# EAGLE board Sensor Carousel (EAGLE 9.2.2)
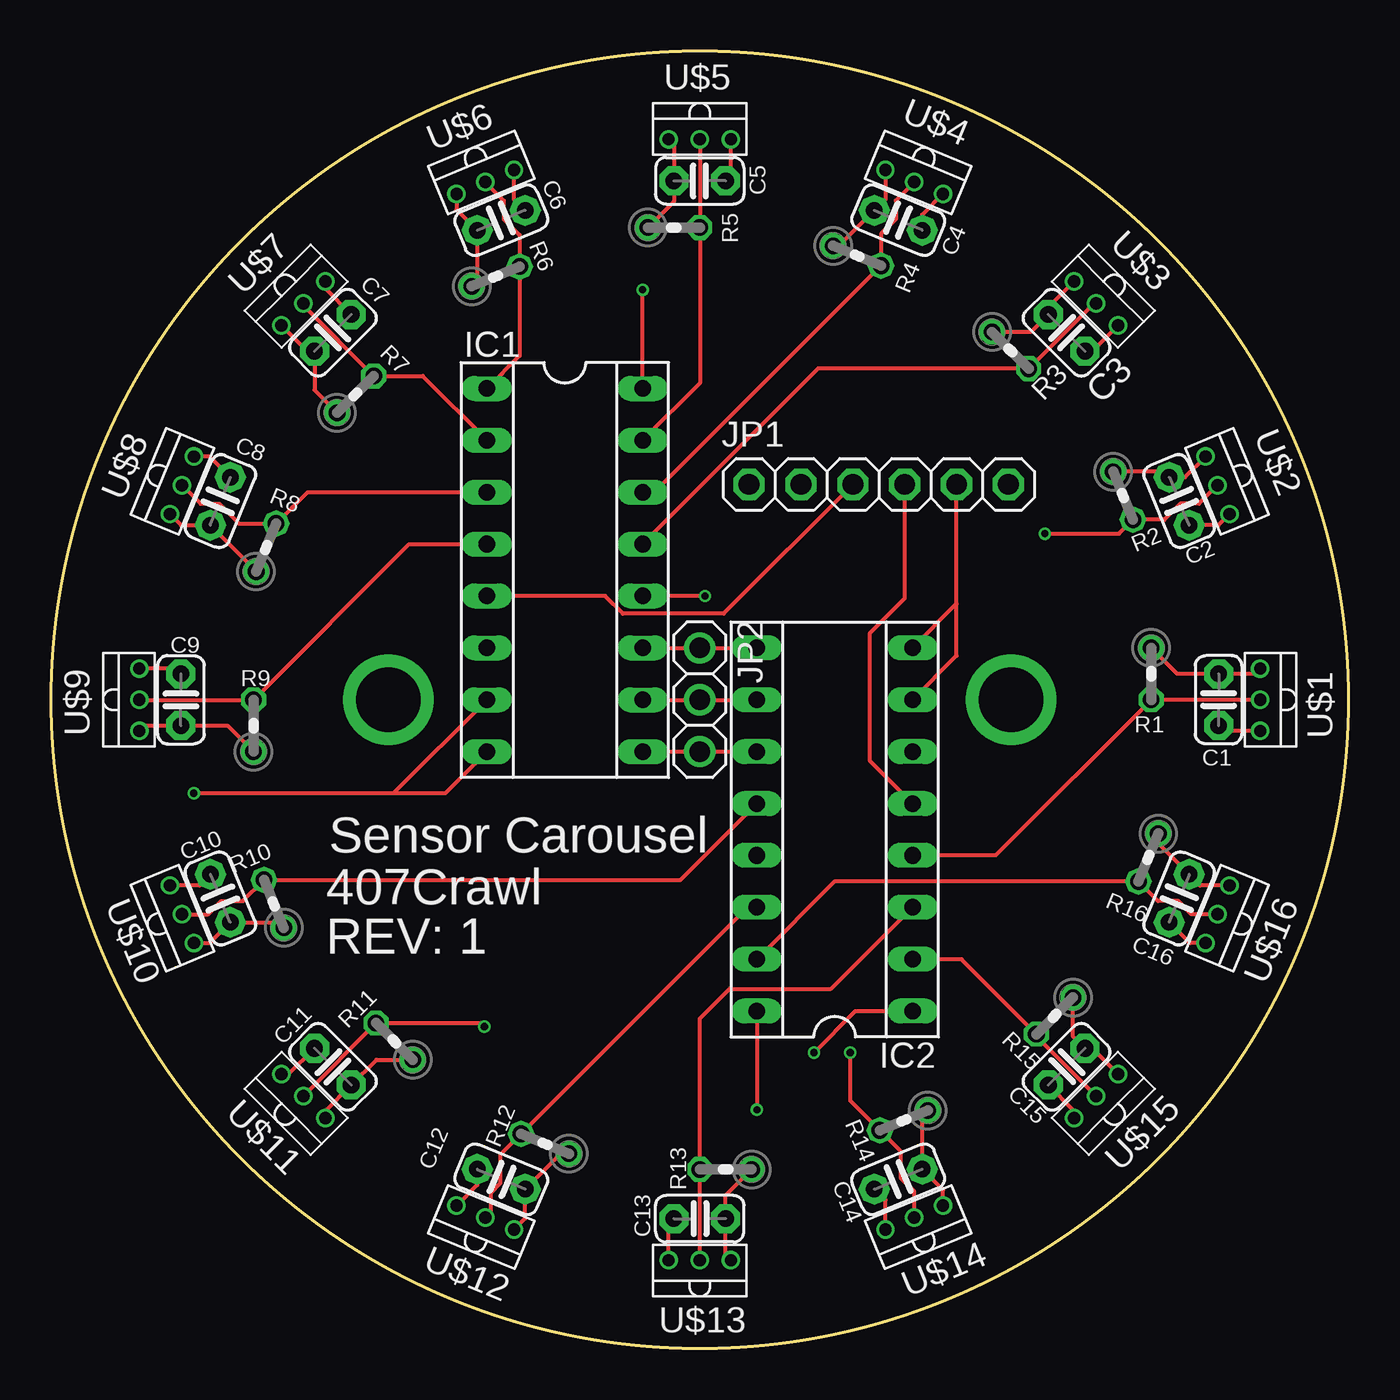
[diagram p0: board, top side]
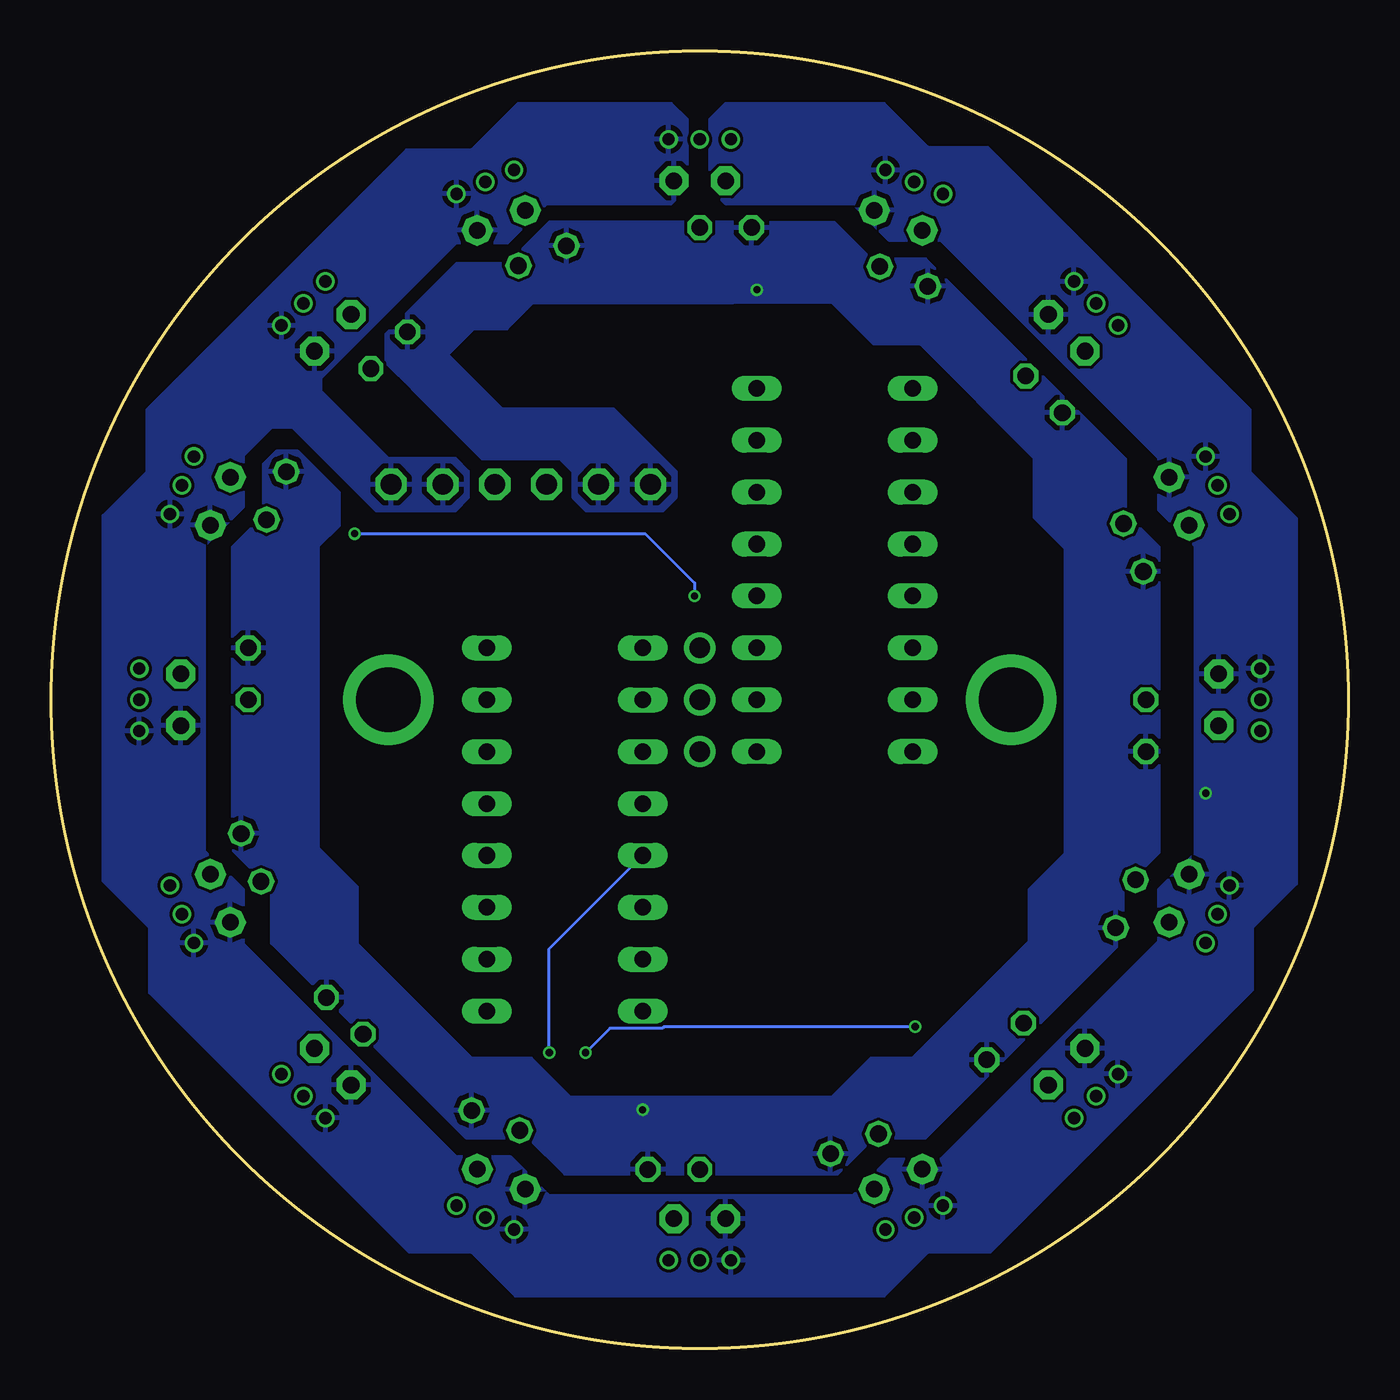
[diagram p1: board, bottom side, seen from below]

Size 63.5 x 63.5 mm. Coordinates in mm from the lower left corner, seen from the top.
Outline: circle at 31.75,31.75 radius 31.75
Copper layers (1*16): Top 0.035559375mm / dielectric 1.6mm / Bottom 0.035559375mm
Design rules "oshpark-2layer": minimum track width 6mil, minimum drill 10mil, track to track 6mil, track to pad 6mil, pad to pad 6mil, via to via 6mil, smd to smd 6mil, copper to edge 15mil, drill to drill 6mil, minimum pad ring 5mil, minimum via ring 5mil, stop-mask expansion 2.5mil, vias tented up to drill 0mil, thermal gap 10mil

## Footprints (pad centres in the part's own frame; a part is rotated, then mirrored left to right if it is on the bottom)
C025-024X044 = drill 0.813 pad 1.422 octagon: 1 -1.27,0; 2 1.27,0
CD74HCT151 = drill 0.813 long: 1 -8.89,-3.81; 2 -6.35,-3.81; 3 -3.81,-3.81; 4 -1.27,-3.81; 5 1.27,-3.81; 6 3.81,-3.81; 7 6.35,-3.81; 8 8.89,-3.81; 9 8.89,3.81; 10 6.35,3.81; 11 3.81,3.81; 12 1.27,3.81; 13 -1.27,3.81; 14 -3.81,3.81; 15 -6.35,3.81; 16 -8.89,3.81
1X06 = drill 1.016 octagon: 1 -6.35,0; 2 -3.81,0; 3 -1.27,0; 4 1.27,0; 5 3.81,0; 6 6.35,0
1X03 = drill 1.016: 1 -2.54,0; 2 0,0; 3 2.54,0
MOUNTING_HOLE = drill 3.175 pad 4.445: P$1 0,0
0204V = drill 0.813 octagon: 1 -1.27,0; 2 1.27,0
LSR_RC = drill 0.6: P$1 1.778,-1.524; P$2 1.778,0; P$3 1.778,1.524

## Placement (x,y rotation side)
C1  0.1uF  [C025-024X044]  57.15,31.75 90 top
C2  0.1uF  [C025-024X044]  55.22,41.47 112.5 top
C3  0.1uF  [C025-024X044]  49.71,49.71 135 top
C4  0.1uF  [C025-024X044]  41.47,55.22 157.5 top
C5  0.1uF  [C025-024X044]  31.75,57.15 180 top
C6  0.1uF  [C025-024X044]  22.03,55.22 202.5 top
C7  0.1uF  [C025-024X044]  13.79,49.71 225 top
C8  0.1uF  [C025-024X044]  8.28,41.47 247.5 top
C9  0.1uF  [C025-024X044]  6.35,31.75 270 top
C10  0.1uF  [C025-024X044]  8.28,22.03 292.5 top
C11  0.1uF  [C025-024X044]  13.79,13.79 315 top
C12  0.1uF  [C025-024X044]  22.03,8.28 337.5 top
C13  0.1uF  [C025-024X044]  31.75,6.35 0 top
C14  0.1uF  [C025-024X044]  41.47,8.28 22.5 top
C15  0.1uF  [C025-024X044]  49.71,13.79 45 top
C16  0.1uF  [C025-024X044]  55.22,22.03 67.5 top
IC1  [CD74HCT151]  25.15,38.1 270 top
IC2  [CD74HCT151]  38.35,25.4 90 top
JP1  [1X06]  40.51,42.29 0 top
JP2  [1X03]  31.75,31.75 270 top
MGT1  MOUNTING_HOLE  [MOUNTING_HOLE]  46.99,31.75 0 top
MGT2  MOUNTING_HOLE  [MOUNTING_HOLE]  16.51,31.75 0 top
R1  1k  [0204V]  53.85,33.02 270 top
R2  1k  [0204V]  52.47,41.74 292.5 top
R3  1k  [0204V]  46.95,48.86 315 top
R4  1k  [0204V]  39.45,53.49 337.5 top
R5  1k  [0204V]  30.48,54.86 0 top
R6  1k  [0204V]  21.76,52.47 22.5 top
R7  1k  [0204V]  14.9,46.7 45 top
R8  1k  [0204V]  10.52,39.2 67.5 top
R9  1k  [0204V]  9.91,30.48 90 top
R10  1k  [0204V]  10.9,21.76 112.5 top
R11  1k  [0204V]  16.8,15.02 135 top
R12  1k  [0204V]  24.17,10.01 157.5 top
R13  1k  [0204V]  33.02,8.76 180 top
R14  1k  [0204V]  41.74,11.16 202.5 top
R15  1k  [0204V]  49.13,16.28 225 top
R16  1k  [0204V]  53.71,24.03 247.5 top
U$1  LASER_REC  [LSR_RC]  60.96,31.75 180 top
U$2  LASER_REC  [LSR_RC]  58.74,42.93 202.5 top
U$3  LASER_REC  [LSR_RC]  52.4,52.4 225 top
U$4  LASER_REC  [LSR_RC]  42.93,58.74 247.5 top
U$5  LASER_REC  [LSR_RC]  31.75,60.96 270 top
U$6  LASER_REC  [LSR_RC]  20.57,58.74 292.5 top
U$7  LASER_REC  [LSR_RC]  11.1,52.4 315 top
U$8  LASER_REC  [LSR_RC]  4.76,42.93 337.5 top
U$9  LASER_REC  [LSR_RC]  2.54,31.75 0 top
U$10  LASER_REC  [LSR_RC]  4.76,20.57 22.5 top
U$11  LASER_REC  [LSR_RC]  11.1,11.1 45 top
U$12  LASER_REC  [LSR_RC]  20.57,4.76 67.5 top
U$13  LASER_REC  [LSR_RC]  31.75,2.54 90 top
U$14  LASER_REC  [LSR_RC]  42.93,4.76 112.5 top
U$15  LASER_REC  [LSR_RC]  52.4,11.1 135 top
U$16  LASER_REC  [LSR_RC]  58.74,20.57 157.5 top

## Library data of the parts
C1-C16 JP1 JP2 R1-R16 = adafruit
IC1 IC2 MGT1 MGT2 U$1-U$16 = ENGI301

## Nets
A0: IC1.11 IC2.9 JP2.1
A1: IC1.10 IC2.10 JP2.2
A2: IC1.9 IC2.11 JP2.3
GND: C1.1 C2.1 C3.1 C4.1 C5.1 C6.1 C7.1 C8.1 C9.1 C10.1 C11.1 C12.1 C13.1 C14.1 C15.1 C16.1 IC1.7 IC1.8 IC2.7 IC2.8 JP1.5 JP1.6 U$1.P$3 U$2.P$3 U$3.P$3 U$4.P$3 U$5.P$3 U$6.P$3 U$7.P$3 U$8.P$3 U$9.P$3 U$10.P$3 U$11.P$3 U$12.P$3 U$13.P$3 U$14.P$3 U$15.P$3 U$16.P$3
U1: IC2.4 R1.2 U$1.P$2
U2: IC1.12 R2.2 U$2.P$2
U3: IC1.13 R3.2 U$3.P$2
U4: IC1.14 R4.2 U$4.P$2
U5: IC1.15 R5.2 U$5.P$2
U6: IC1.1 R6.2 U$6.P$2
U7: IC1.2 R7.2 U$7.P$2
U8: IC1.3 R8.2 U$8.P$2
U9: IC1.4 R9.2 U$9.P$2
U10: IC2.12 R10.2 U$10.P$2
U11: IC2.1 R11.2 U$11.P$2
U12: IC2.14 R12.2 U$12.P$2
U13: IC2.3 R13.2 U$13.P$2
U14: IC2.13 R14.2 U$14.P$2
U15: IC2.2 R15.2 U$15.P$2
U16: IC2.15 R16.2 U$16.P$2
VIN_5V: C1.2 C2.2 C3.2 C4.2 C5.2 C6.2 C7.2 C8.2 C9.2 C10.2 C11.2 C12.2 C13.2 C14.2 C15.2 C16.2 IC1.16 IC2.16 JP1.1 JP1.2 R1.1 R2.1 R3.1 R4.1 R5.1 R6.1 R7.1 R8.1 R9.1 R10.1 R11.1 R12.1 R13.1 R14.1 R15.1 R16.1 U$1.P$1 U$2.P$1 U$3.P$1 U$4.P$1 U$5.P$1 U$6.P$1 U$7.P$1 U$8.P$1 U$9.P$1 U$10.P$1 U$11.P$1 U$12.P$1 U$13.P$1 U$14.P$1 U$15.P$1 U$16.P$1
Y1: IC1.5 JP1.3
Y2: IC2.5 JP1.4

## Tracks (layer width: path | path; a pad name or v marks a point on that pad's centre or on a via)
A0
  Top 0.203: IC1.11 JP2.1 IC2.9
A1
  Top 0.203: IC1.10 JP2.2 IC2.10
A2
  Top 0.203: IC1.9 JP2.3 IC2.11
GND  (via drill 0.35)
  Top 0.203: U$1.P$3 57.4,30.23 C1.1 | U$2.P$3 57.13,40.3 C2.1 | U$3.P$3 50.97,48.81 C3.1 | IC2.8 44.32,36.45 JP1.5 44.32,33.91 IC2.7 | IC1.8 19.3,27.18 v6.98,27.18 16.76,27.18 IC1.7 | U$4.P$3 42.64,55.5 C4.1 | C5.1 33.27,57.4 U$5.P$3 | C6.1 22.66,56.25 U$6.P$3 | C7.1 13.43,51.87 U$7.P$3 | C8.1 7.76,43.66 U$8.P$3 | C9.1 6.1,33.27 U$9.P$3 | C10.1 7.25,22.66 U$10.P$3 | U$11.P$3 11.63,13.43 C11.1 | U$13.P$3 30.23,6.1 C13.1 | U$14.P$3 40.84,7.25 C14.1 | U$15.P$3 50.07,11.63 C15.1 | U$16.P$3 55.74,19.84 C16.1 | C12.1 20.86,8 U$12.P$3
  pour Bottom: 30.48,60.96 22.73,60.96 20.57,58.8 17.65,58.8 4.83,45.97 4.83,42.93 2.54,40.64 2.54,22.73 4.7,20.57 4.7,17.53 17.53,4.7 20.57,4.7 22.73,2.54 40.77,2.54 42.93,4.7 45.97,4.7 58.67,17.4 58.67,20.57 60.96,22.86 60.96,40.77 58.8,42.93 58.8,45.97 46.1,58.67 42.93,58.67 40.64,60.96 33.15,60.96 32.38,60.2 32.38,56.77 33.15,56.01 39.24,56.01 41.15,54.1 43.69,54.1 54.1,43.69 54.1,41.15 56.01,39.24 56.01,24.38 54.1,22.48 54.1,19.81 43.69,9.4 41.02,9.4 39.12,7.49 24.26,7.49 22.48,9.27 19.94,9.27 9.27,19.94 9.27,22.48 7.49,24.26 7.49,39.24 9.27,41.02 9.27,43.56 19.94,54.23 22.48,54.23 24.26,56.01 30.48,56.01 31.24,56.77 31.24,60.2
  pour Bottom: 43.05,42.93 43.69,43.56 46.99,43.56 50.29,46.86 50.29,48.01 53.21,45.09 51.69,45.09 47.62,41.02 43.69,41.02 43.05,41.66
U1
  Top 0.203: U$1.P$2 R1.2 46.23,24.13 IC2.4
U2  (via drill 0.35)
  Top 0.203: U$2.P$2 56.19,41.34 55.27,41.34 54.49,40.56 R2.2 52.27,39.88 v48.64,39.88 | v32,36.83 IC1.12
  Bottom 0.152: v48.64,39.88 34.42,39.88 32,37.47 v32,36.83
U3
  Top 0.203: U$3.P$2 51.04,51.15 R3.2 37.54,47.96 IC1.13
U4
  Top 0.203: U$4.P$2 41.34,56.19 41.34,55.27 40.63,54.55 R4.2 29.54,41.91 IC1.14
U5
  Top 0.203: U$5.P$2 R5.2 31.75,47.24 IC1.15
U6
  Top 0.203: U$6.P$2 22.16,56.19 22.16,55.27 22.94,54.49 R6.2 22.94,48.59 IC1.1
U7
  Top 0.203: U$7.P$2 12.35,51.04 R7.2 18.19,47.59 IC1.2
U8
  Top 0.203: U$8.P$2 7.31,41.34 8.23,41.34 9.2,40.37 R8.2 12.55,41.91 IC1.3
U9
  Top 0.203: U$9.P$2 R9.2 17.53,39.37 IC1.4
U10
  Top 0.203: U$10.P$2 7.69,21.25 8.34,21.9 9.38,21.9 R10.2 30.81,22.94 IC2.12
U11  (via drill 0.35)
  Top 0.203: U$11.P$2 12.35,12.37 R11.2 21.03,15.92 v21.21,15.75 | v37.34,14.48 39.37,16.51 IC2.1
  Bottom 0.152: v21.21,15.75 33.51,15.75 33.59,15.67 36.14,15.67 v37.34,14.48
U12
  Top 0.203: U$12.P$2 21.51,6.66 21.51,7.6 22,8.09 22,9.5 R12.2 34.09,21.59 IC2.14
U13
  Top 0.203: U$13.P$2 R13.2 31.75,16.15 33.21,17.6 38.18,17.6 IC2.3
U14  (via drill 0.35)
  Top 0.203: U$14.P$2 42.25,7.69 41.6,8.34 41.6,9.64 R14.2 39.12,12.12 v39.12,14.48
  Bottom 0.152: v39.12,14.48 39.12,19.56 IC2.13
U15
  Top 0.203: U$15.P$2 48.23,15.27 R15.2 44.56,19.05 IC2.2
U16
  Top 0.203: U$16.P$2 55.81,21.25 55.16,21.9 54.18,21.9 R16.2 38.35,22.86 IC2.15
VIN_5V  (via drill 0.35)
  Top 0.203: U$7.P$1 12.53,48.81 C7.2 12.89,46.91 R7.1 | U$3.P$1 48.81,50.97 C3.2 47.96,49.75 R3.1 | U$2.P$1 55.5,42.64 C2.2 54.46,42.91 R2.1 | U$1.P$1 58.93,33.02 C1.2 55.12,33.02 R1.1 | U$16.P$1 56.25,22.66 C16.2 54.2,24.71 R16.1 | U$12.P$1 23.2,6.37 C12.2 24.93,9.53 R12.1 | U$13.P$1 33.02,4.57 C13.2 33.02,7.49 R13.1 | U$14.P$1 43.66,7.76 C14.2 42.64,11.38 R14.1 | U$4.P$1 40.84,56.25 C4.2 38.57,53.97 R4.1 | U$5.P$1 30.48,58.93 C5.2 30.48,56.13 R5.1 | U$6.P$1 19.84,55.74 C6.2 20.86,52.25 R6.1 | U$8.P$1 6.37,40.3 C8.2 10.04,38.06 R8.1 | U$9.P$1 4.57,30.48 C9.2 8.64,30.48 R9.1 | U$10.P$1 7.76,19.84 C10.2 11.12,20.86 R10.1 | U$11.P$1 13.43,11.63 C11.2 15.92,14.13 R11.1 | U$15.P$1 50.97,14.69 C15.2 50.02,15.27 R15.1 | IC2.16 v34.54,11.68 | IC1.16 v28.96,51.82
  pour Bottom: 30.1,55.12 25.15,55.12 23.37,53.34 20.7,53.34 10.92,43.56 10.92,40.89 9.27,39.24 9.27,24.26 11.05,22.48 11.05,19.94 20.7,10.29 23.24,10.29 25.02,8.51 38.35,8.51 40.13,10.29 43.18,10.29 52.7,19.81 52.7,22.48 54.61,24.38 54.61,39.24 53.34,40.51 51.69,40.51 50.42,39.24 50.42,24.51 48.51,22.61 48.51,19.81 42.93,14.22 40.01,14.22 38.1,12.32 25.27,12.32 23.37,14.22 21.34,14.22 15.62,19.94 15.62,22.48 13.84,24.26 13.84,39.12 15.37,40.64 15.37,43.56 20.95,49.15 23.24,49.15 25.27,51.18 30.1,51.18 30.99,52.07 30.99,54.23
  pour Bottom: 30.1,55.12 39.12,55.12 41.15,53.09 43.69,53.09 47.12,49.66 47.12,48.26 45.78,46.93 42.8,49.91 41.18,49.91 39.91,51.18 30.1,51.18
  pour Bottom: 45.85,46.99 42.42,43.56 38.61,43.56 37.97,42.93 37.97,41.66 37.34,41.02 33.53,41.02 32.89,41.66 32.89,42.93 35.94,45.97 41.4,45.97 44.07,48.64 45.72,46.99
  pour Bottom: 54.61,39.24 53.09,40.77 53.09,42.04 53.09,43.31 52.45,43.94 51.44,43.94 50.55,43.05 49.4,41.91 49.4,40.26 50.42,39.24
Y1
  Top 0.203: IC1.5 27.12,36.83 27.99,35.97 32.92,35.97 JP1.3
Y2
  Top 0.203: JP1.4 41.78,36.72 40.08,35.02 40.08,28.75 IC2.5

## Text on the board
tPlace: Sensor Carousel | 407Crawl | REV: 1